# Altium PCB PCB1.PcbDoc
Units mil, origin at the board's own origin, x right, y up, seen from the top; angles counter-clockwise.
Board outline 1460 x 1490 mil, 2 copper layers (Top Layer, Bottom Layer); 54 components, 69 nets, 275 pads, 150 vias.
Unrouted connection lines stored in the file: 1.
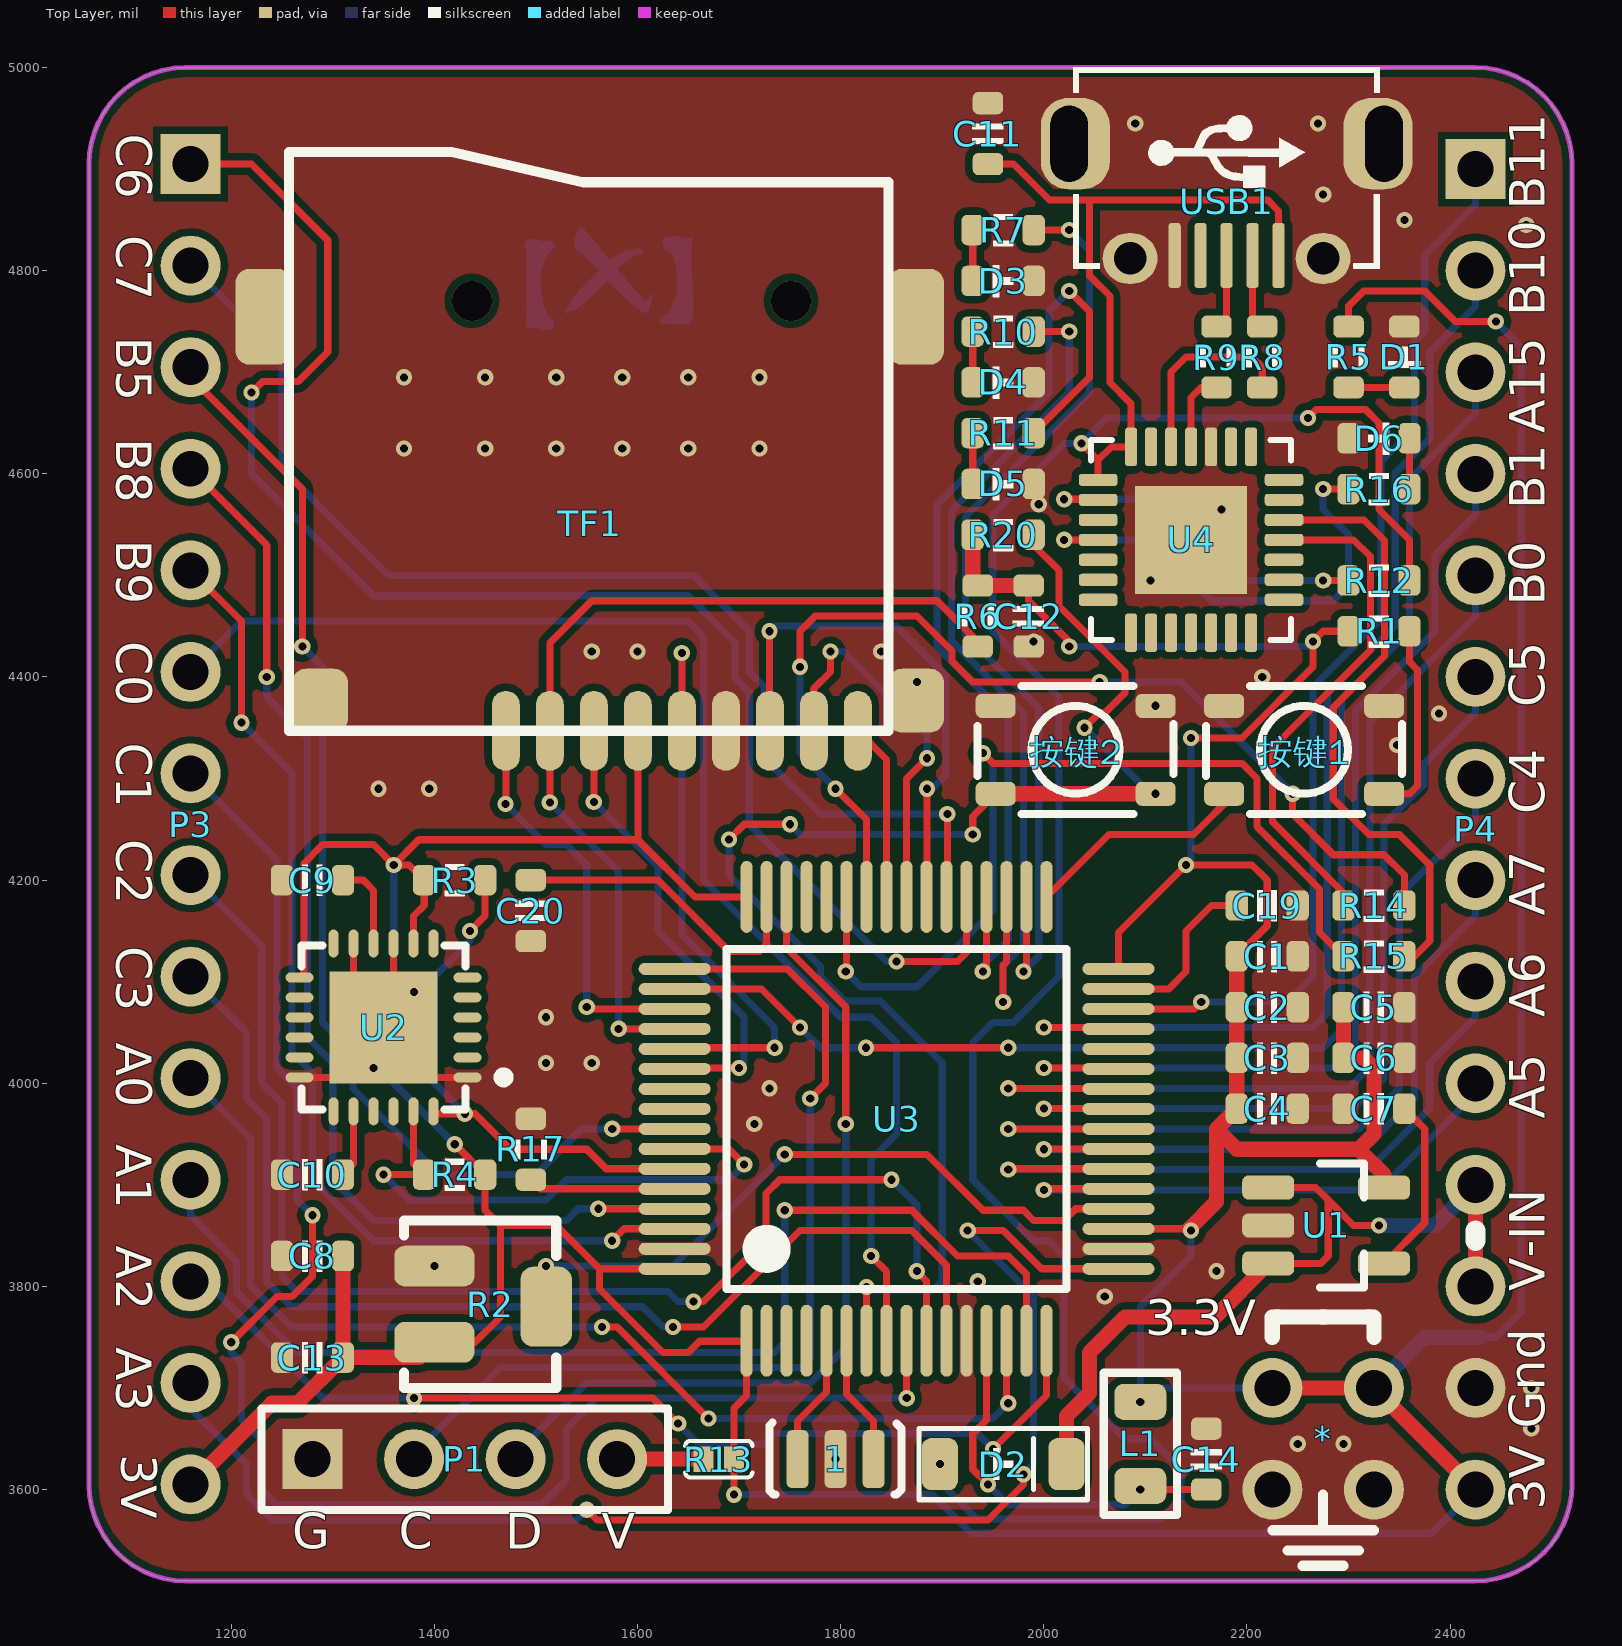
[diagram p0: Top Layer view]
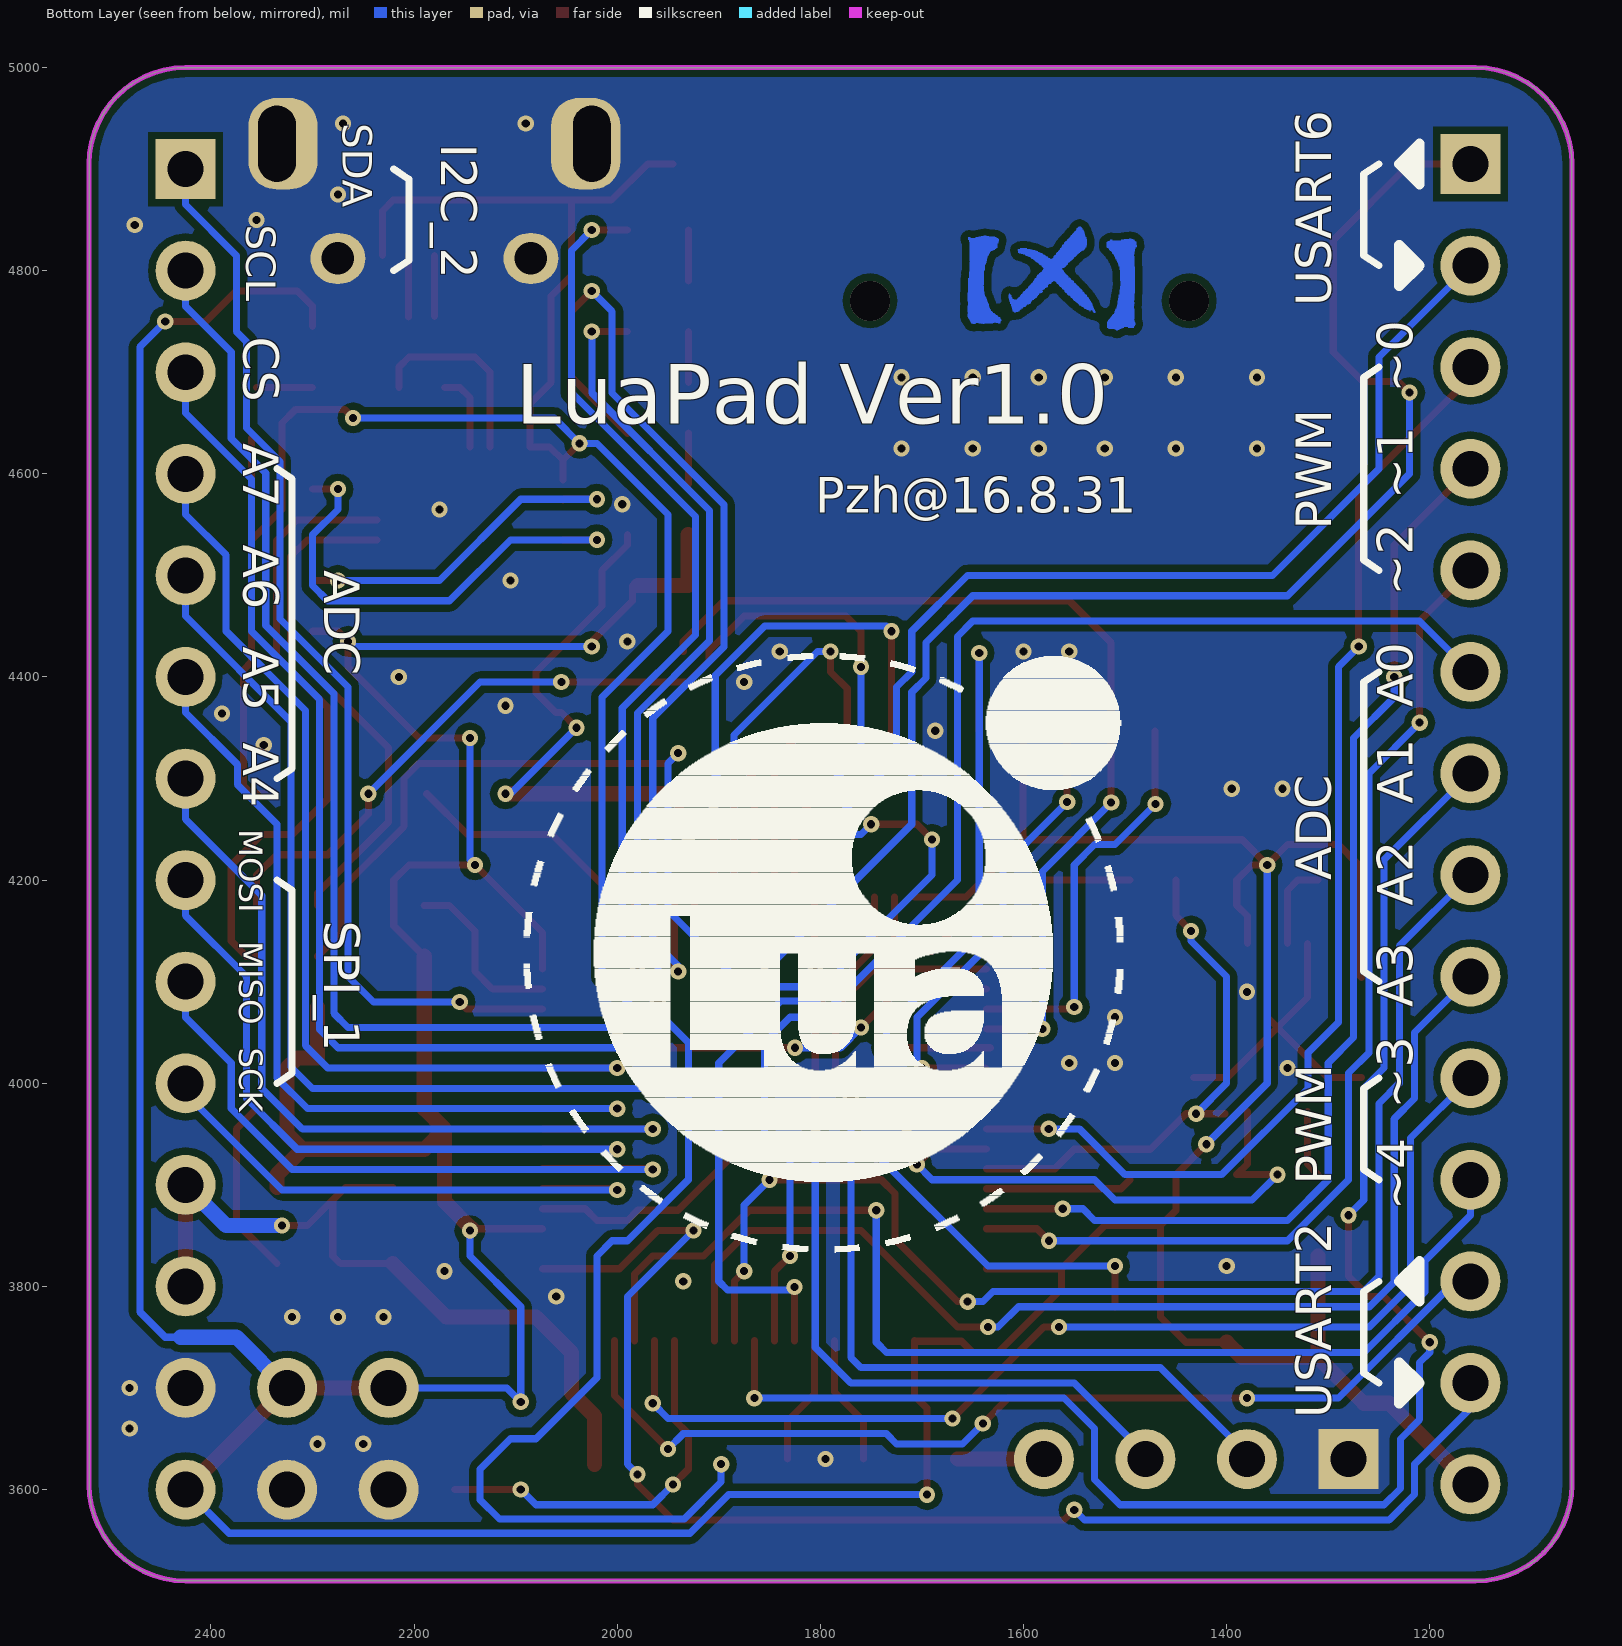
[diagram p1: Bottom Layer view, seen from below]
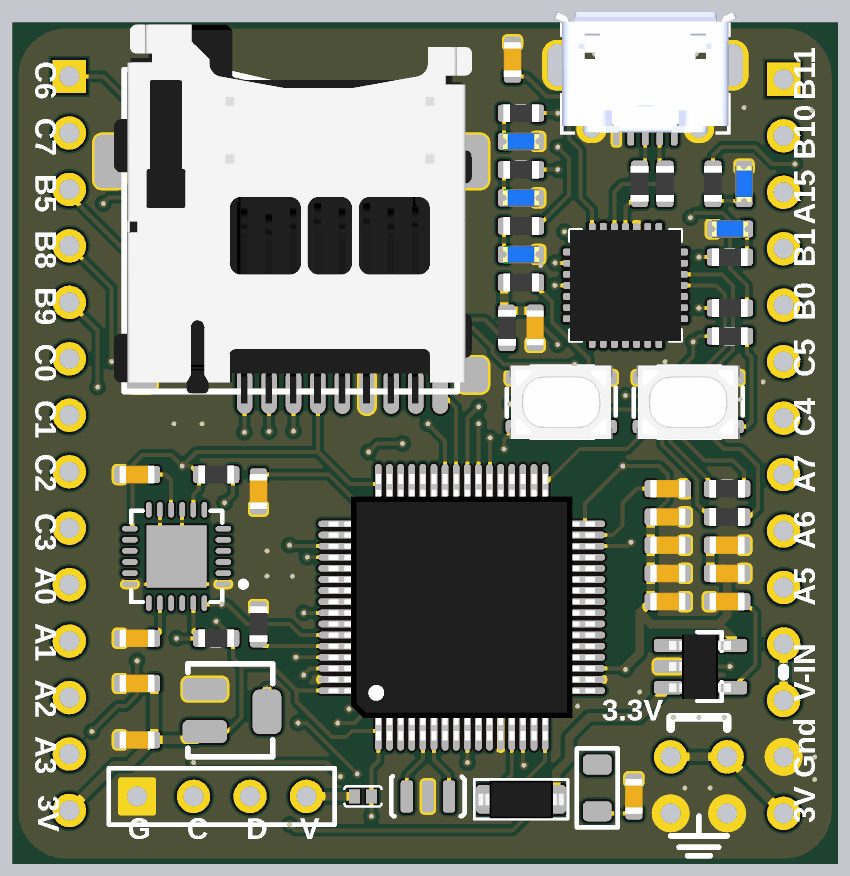
[diagram p2: 3D render of the assembled board from above, using the file's embedded part models]

## Layer stack, top to bottom
Top Solder: solder mask 0.4, Solder Resist, Dk 3.5
Top Layer: signal copper 1.4
Dielectric 1: dielectric 12.6, FR-4, Dk 4.8
Bottom Layer: signal copper 1.4
Bottom Solder: solder mask 0.4, Solder Resist, Dk 3.5

## Board outline
1155,3510 cw(c1155,3605) 1060,3605 1060,4905 cw(c1155,4905) 1155,5000 2425,5000 cw(c2425,4905) 2520,4905 2520,3605 cw(c2425,3605) 2425,3510

## Design rules (kind name [scope] priority, off if disabled: settings)
Clearance [All] p1: gap=7
MinimumSolderMaskSliver [All] p1: minsoldermaskwidth=1
PolygonConnect [All] p1: connectstyle=Direct reliefconductorwidth=10 reliefentries=4 polygonreliefangle="90 Angle" airgapwidth=10
RoutingVias [All] p1: holewidth=28 width=50 viastyle="Through Hole" minholewidth=28 minwidth=50 maxholewidth=28 maxwidth=50
SilkToSolderMaskClearance [IsPad] p1: minsilkscreentomaskgap=0 clearancetoexposedcopper=TRUE
SolderMaskExpansion [All] p1: expansion=4
UnpouredPolygon [All] p1: allowunpoured=FALSE
Width [All] p1: maxlimit=10000 minlimit=6 preferedwidth=7
27 further rules are at their usual default settings.

## Components (designator, comment, footprint, x,y, rotation, side; value= is the part's Value field where it differs from the comment)
1 "晶振-3Pin" 晶振-3P 1795,3630 r0 top
* "4PD" 4P 2225,3700 r0 top
C1 "10uF" 0603-CAP 2220,4125 r180 top
C2 "0.1uF" 0603-CAP 2220,4075 r0 top
C3 "0.1uF" 0603-CAP 2220,4025 r0 top
C4 "0.1uF" 0603-CAP 2220,3975 r0 top
C5 "电容-0603" 0603-CAP 2325,4075 r0 top
C6 "0.1uF" 0603-CAP 2325,4025 r0 top
C7 "10nF" 0603-CAP 2325,3975 r0 top
C8 "0.01uF" 0603-CAP 1280,3830 r0 top
C9 "0.1uF" 0603-CAP 1280,4200 r0 top
C10 "2.2nF" 0603-CAP 1280,3910 r180 top
C11 "1uF" 0603-CAP 1945,4935 r270 top
C12 "4.7uF" 0603-CAP 1985,4460 r270 top
C13 "0.1uF" 0603-CAP 1280,3730 r0 top
C14 "电容-0603" 0603-CAP 2160,3630 r270 top
C19 "2.2uF" 0603-CAP 2220,4175 r180 top
C20 "2.2uF" 0603-CAP 1495,4170 r90 top
D1 "LED-0603" 0603-LED-BLUE 2355,4715 r90 top
D2 "二极管-5819W" SOD-123 1960,3625 r0 top
D3 "LED-0603" 0603-LED-BLUE 1960,4790 r0 top
D4 "LED-0603" 0603-LED-BLUE 1960,4690 r0 top
D5 "LED-0603" 0603-LED-BLUE 1960,4590 r0 top
D6 "LED-0603" 0603-LED-BLUE 2330,4635 r180 top
L1 "10uH" 0805-L 2095,3645 r270 top
P1 "Header 4" HDR1X4 1280,3630 r0 top
P3 "14PL" 14P 1160,4905 r270 top
P4 "14PR" 14P 2425,4900 r270 top
R1 "4.7K" 0603-RES 2330,4445 r180 top
R2 "电位器-贴片" "贴片电位器 3*3" 1470,3775 r0 top
R3 "10K" 0603-RES 1420,4200 r180 top
R4 "10K" 0603-RES 1420,3910 r0 top
R5 "500R" 0603-RES 2300,4715 r270 top
R6 "100K" 0603-RES 1935,4460 r90 top
R7 "500R" 0603-RES 1960,4840 r180 top
R8 "22R" 0603-RES 2215,4715 r270 top
R9 "22R" 0603-RES 2170,4715 r270 top
R10 "500R" 0603-RES 1960,4740 r180 top
R11 "500R" 0603-RES 1960,4640 r180 top
R12 "10K" 0603-RES 2330,4495 r0 top
R13 "电阻-0R" 0402-0R 1680,3630 r0 top
R14 "1K" 0603-RES 2325,4175 r0 top
R15 "1K" 0603-RES 2325,4125 r180 top
R16 "500R" 0603-RES 2330,4585 r0 top
R17 "100K" 0603-RES 1495,3935 r90 top
R20 "4.7K" 0603-RES 1960,4540 r180 top
TF1 "TF" TF-SOCKET 1290,4675 r90 top
U1 "LP2992" SOT23-5 2280,3860 r0 top
U2 "MPU6050" QFN-24 1350,4055 r180 top
U3 "STM32F405RGT6" LQFP-64_N 1855,3965 r90 top
U4 "CP2102" QFN-28 2145,4535 r270 top
USB1 "USB-Micro" USB_Micro-AB 2180,4915 r0 top
按键1 "Reset" SW-KEY2 2335,4285 r180 top
按键2 "Reset" SW-KEY2 2110,4285 r180 top

## Footprints (in the part's own frame and the unit in brackets; to place one, negate y for a bottom-side part, rotate by r counter-clockwise, add the part's x,y. Pads: shape width x height; smd on the part's side, far side on the other; paste and mask are expansions set on the pad)
4P [mm] "Connector; Header; 4 Position"
  round 1.5 hole 0.9: 1(0,0) 2(2.54,0) 3(0,-2.54) 4(2.54,-2.54)
14P [mm] "Connector; Header; 4 Position"
  rect 1.5x1.5 hole 0.9: 1(0,0)
  round 1.5 hole 0.9: 2(2.54,0) 3(5.08,0) 4(7.62,0) 5(10.16,0) 6(12.7,0) 7(15.24,0) 8(17.78,0) 9(20.32,0) 10(22.86,0) 11(25.4,0) 12(27.94,0) 13(30.48,0) 14(33.02,0)
0402-0R [mil] "选择焊盘"
  rect 19.68x25 smd: 1(-15,0) 2(15,0)
  silkscreen extent -33,-18 33,18
0603-CAP [mil]
  rrect50% 22x30 smd: 1(-30,0) 2(30,0)
  silkscreen extent -10,-15 10,15, body extent -31,-16 32,16, height 31
0603-LED-BLUE [mil]
  rrect50% 22x30 smd: 1(-30,0) 2(30,0)
  silkscreen extent -10,-16 10,16, body extent -32,-16 32,16, height 24
0603-RES [mil]
  rrect50% 22x30 smd: 1(-30,0) 2(30,0)
  silkscreen extent -10,-16 10,16, body extent -31,-16 31,16, height 18
0805-L [mm]
  rrect50% 0.9x1.3 smd: 1(-1.05,0) 2(1.05,0)
  silkscreen extent -1.78,-0.91 1.78,0.91, body extent -1,-0.6 1,0.6, height 0.76
HDR1X4 [mm] "Connector; Header; 4 Position"
  rect 1.5x1.5 hole 0.9: 1(0,0)
  round 1.5 hole 0.9: 2(2.54,0) 3(5.08,0) 4(7.62,0)
  silkscreen extent -1.27,-1.27 8.89,1.27
LQFP-64_N [mm] "Thin QFP, 64-Leads, Body 10x10mm, Pitch 0.5mm, IPC Medium Density"
  oval 1.8x0.3 smd: 1(-5.55,3.75) 2(-5.55,3.25) 3(-5.55,2.75) 4(-5.55,2.25) 5(-5.55,1.75) 6(-5.55,1.25) 7(-5.55,0.75) 8(-5.55,0.25) 9(-5.55,-0.25) 10(-5.55,-0.75) 11(-5.55,-1.25) 12(-5.55,-1.75) 13(-5.55,-2.25) 14(-5.55,-2.75) 15(-5.55,-3.25) 16(-5.55,-3.75) 33(5.55,-3.75) 34(5.55,-3.25) 35(5.55,-2.75) 36(5.55,-2.25) 37(5.55,-1.75) 38(5.55,-1.25) 39(5.55,-0.75) 40(5.55,-0.25) 41(5.55,0.25) 42(5.55,0.75) 43(5.55,1.25) 44(5.55,1.75) 45(5.55,2.25) 46(5.55,2.75) 47(5.55,3.25) 48(5.55,3.75)
  oval 0.3x1.8 smd: 17(-3.75,-5.55) 18(-3.25,-5.55) 19(-2.75,-5.55) 20(-2.25,-5.55) 21(-1.75,-5.55) 22(-1.25,-5.55) 23(-0.75,-5.55) 24(-0.25,-5.55) 25(0.25,-5.55) 26(0.75,-5.55) 27(1.25,-5.55) 28(1.75,-5.55) 29(2.25,-5.55) 30(2.75,-5.55) 31(3.25,-5.55) 32(3.75,-5.55) 49(3.75,5.55) 50(3.25,5.55) 51(2.75,5.55) 52(2.25,5.55) 53(1.75,5.55) 54(1.25,5.55) 55(0.75,5.55) 56(0.25,5.55) 57(-0.25,5.55) 58(-0.75,5.55) 59(-1.25,5.55) 60(-1.75,5.55) 61(-2.25,5.55) 62(-2.75,5.55) 63(-3.25,5.55) 64(-3.75,5.55)
  silkscreen extent -4.25,-4.25 4.25,4.25, body extent -5.99,-5.99 5.98,5.98, height 1.6
QFN-24 [mm] "QFN, 24-Leads, Body 4.1x4.1mm (max), Pitch 0.50mm, IPC Low Density"
  oval 0.7x0.25 smd: 1(-2.1,1.25) 2(-2.1,0.75) 3(-2.1,0.25) 4(-2.1,-0.25) 5(-2.1,-0.75) 6(-2.1,-1.25) 13(2.1,-1.25) 14(2.1,-0.75) 15(2.1,-0.25) 16(2.1,0.25) 17(2.1,0.75) 18(2.1,1.25)
  oval 0.25x0.7 smd: 7(-1.25,-2.1) 8(-0.75,-2.1) 9(-0.25,-2.1) 10(0.25,-2.1) 11(0.75,-2.1) 12(1.25,-2.1) 19(1.25,2.1) 20(0.75,2.1) 21(0.25,2.1) 22(-0.25,2.1) 23(-0.75,2.1) 24(-1.25,2.1)
  rect 2.7x2.8 smd: ""(0,0)
  silkscreen extent -3.13,-2.05 2.05,2.05, body extent -2.05,-2.05 2.05,2.05, height 0.95
QFN-28 [mil]
  rrect50% 38x12 smd mask+5: 1(-91.5,59.06) 2(-91.5,39.37) 3(-91.5,19.68) 4(-91.5,0) 5(-91.5,-19.68) 6(-91.5,-39.37) 7(-91.5,-59.06) 15(91.5,-59.06) 16(91.5,-39.37) 17(91.5,-19.68) 18(91.5,0) 19(91.5,19.68) 20(91.5,39.37) 21(91.5,59.06)
  rrect50% 12x38 smd mask+5: 8(-59.06,-91.5) 9(-39.37,-91.5) 10(-19.69,-91.5) 11(0,-91.5) 12(19.69,-91.5) 13(39.37,-91.5) 14(59.06,-91.5) 22(59.06,91.5) 23(39.37,91.5) 24(19.69,91.5) 25(0,91.5) 26(-19.69,91.5) 27(-39.37,91.5) 28(-59.06,91.5)
  rect 106.3x110.24 smd: 29(0,0)
  silkscreen extent -99,-99 99,99, body extent -99,-99 98,98, height 35
SOD-123 [mm]
  rrect50% 0.9x1.3 smd: 1(-1.583,0) 2(1.583,0)
  silkscreen extent -2.11,-0.89 2.11,0.89, body extent -1.92,-0.86 1.93,0.84, height 1.48
SOT23-5 [mm] "SOT23, 3-Leads, Body 3.1x3.0mm (max), Pitch 0.95mm, IPC Medium Density"
  rrect50% 1.3x0.6 smd: 1(-1.5,0.95) 2(-1.5,0) 3(-1.5,-0.95) 4(1.396,-0.95) 5(1.396,0.95)
  silkscreen extent -0.2,-1.55 0.9,1.55, body extent -1.48,-1.45 1.32,1.45, height 1.2
SW-KEY2 [mm]
  rrect50% 1x0.6 smd: 1(0,0) 1(4,0) 2(0,-2.2) 2(4,-2.2)
  silkscreen extent -0.45,-2.7 4.45,0.5, body extent -0.31,-2.74 4.33,0.56, height 2
TF-SOCKET [mm]
  oval 2x0.7 smd: 1(-8.331,-4.582) 2(-8.331,-5.682) 3(-8.331,-6.782) 4(-8.331,-7.882) 5(-8.331,-8.982) 6(-8.331,-10.082) 7(-8.331,-11.182) 8(-8.331,-12.282) 9(-8.331,-13.382)
  rrect50% 1.6x1.4 smd: 10(-7.577,0.068) 10(-7.577,-14.836)
  rrect50% 2.4x1.4 smd: 10(2.023,1.476) 10(2.023,-14.836)
  silkscreen extent -8.33,-14.15 6.15,0.84, body extent -8.87,-14.81 8.18,1.29, height 2.05
USB_Micro-AB [mil]
  rrect80% 68x90 hole 37 slot 75 at 90 deg copper offset 6,0 mask+0: 0(-155,10)
  oval 54x50 hole 32 mask+0: 0(-95,-103) 0(95,-103)
  rrect80% 68x90 hole 37 slot 75 at 90 deg copper offset -6,0 mask+0: 0(155,10)
  rrect50% 12x64 smd: 1(51.18,-100) 2(25.59,-100) 3(0,-100) 4(-25.59,-100) 5(-51.18,-100)
  silkscreen extent -150,-113 150,86, body extent -161,-109 161,104, height 108
晶振-3P [mm] "贴片晶振"
  rrect50% 0.55x1.45 smd: 1(-0.95,0) 2(0,0) 3(0.95,0)
  silkscreen extent -1.65,-0.89 1.65,0.91, body extent -1.75,-0.75 1.75,0.75, height 0.3
"贴片电位器 3*3" [mil]
  rrect50% 78.74x40.18 smd: 1(-70,45) 2(-70,-30)
  rrect50% 50.74x78.74 smd: 3(40,5)
  silkscreen extent -100,-75 50,90

## Part data
1: "村田贴片"
C1 C2 C3 C4 C6 C7 C8 C9 C10 C11 C12 C13 C19 C20: library part 电容-0603, "Capacitor"
C5 C14: "Capacitor"
D1 D3 D4 D5 D6: "LED"
D2: "40V"
L1: library part 电感-0805, "磁珠"
P1: "Header, 4-Pin"
R1 R3 R4 R5 R6 R7 R8 R9 R10 R11 R12 R14 R15 R16 R17 R20: library part 电阻-0603, "Resistor"
R13: "Resistor"
TF1: library part TF卡座, "8脚自弹"
U1: "LDO"
U2: "六轴传感器"
U3: "MCU+FPU"
U4: "USBתTTL"
USB1: "USB"
按键1 按键2: library part 按键-4Pin, "贴片轻触"

## Via types
v1: diameter 16, hole 8, Top Layer to Bottom Layer, tented both sides, 148 vias
v2: diameter 39.37, hole 39.37, Top Layer to Bottom Layer, tented both sides, 2 vias

## Nets (pads, with @x,y where several pads share a name; then routed paths per layer and width w, separated by ;. In a path a pad name is that pad's centre, name@x,y a point inside that pad or via, vN(x,y) a via of type N, cw(c..) or ccw(c..) an arc to the next point about the centre after c; other vN are vias at no path point)
3V3: *.1 *.2 C1.2 C2.1 C3.1 C4.1 C5.1 C6.1 C8.2 C12.1 C13.2 L1.1 P3.14 P4.14 R1.2 R2.2 R3.2 R4.2 R5.1 R6.2 R13.2 R20.2 TF1.4 U1.5 U2.8 U2.13 U3.1 U3.19 U3.32 U3.48 U3.64 | length 6773.7
  Top Layer w7: U2.13 1271.5,4108.39 1271.5,4216.5 1290,4235 1340,4235 v1(1360,4215) ; U2.8 1379.53,4164.53 1390,4175 R3.2 1375,4215 v1(1360,4215) ; R2.2 1440,3745 1465,3770 1465,3860 ; v1(1420,3940) R4.2 1450,3875 1465,3860 ; TF1.4 1600.31,4239.69 ; U3.64 1562.64,3817.36 ; v1(1695,3595) R13.2 1695,3680 1707.36,3692.36 U3.1@1707.36,3746 ; U3.1 U3.1@1707.36,3746 ; U3.48 1656.5,4183.5 1600.31,4239.69 ; C12.1 1985,4475 2025,4435 v1(2025,4430) ; U3.19 v1@2143.27,3856.73 ; U3.32 2073.5,4148.5 v1(2140,4215) 2205,4215 2220,4200 2220,4155 C1.2 ; v1(2145,4340) 2195,4340 2265,4410 v1(2265,4435) 2275,4445 R1.2 ; R5.1 2300,4765 2315,4780 2375,4780 2405,4750 v1(2445,4750) ; v1(1360,4215) 1384.69,4239.69 1600.31,4239.69 ; 1465,3860 1520,3860 1562.64,3817.36 ; 1562.64,3817.36 1562.64,3797.36 1625,3735 1650,3735 1661,3746 U3.1@1707.36,3746
  Top Layer w15: P3.14 1240,3685 1265,3685 C13.2 ; C8.2 C13.2 ; R2.2 1385,3730 C13.2 ; R20.2 1930,4490 R6.2 C12.1@1980,4490 ; v1@2143.27,3856.73 2170,3883.46 2170,3955 ; C1.2 C2.1 C3.1 C4.1 2170,3955 ; *.1 *.2 P4.14 ; C5.1 C6.1 2315,4025 2325,4015 2325,3950 2310,3935 ; U1.5 2334.94,3910.06 2310,3935 ; 2170,3955 2190,3935 2310,3935
  Bottom Layer w7: v1(1360,4215) 1360,4000 v1(1420,3940) ; v1(1695,3595) 1890.2,3595 1928.2,3557 2382,3557 P4.14 ; v1(2025,4430) 2260,4430 v1(2265,4435) ; v1(2140,4215) 2145,4220 v1(2145,4340) ; v1(2145,3855) 2145,3830 2095,3780 v1(2095,3686.34) 2108.66,3700 *.1 ; 2430,3750 2445,3750 2470,3775 2470,4725 v1(2445,4750)
  Bottom Layer w15: *.2 2375,3750 2430,3750
CP_RX: R14.2 U3.42 | length 1043
  Top Layer w7: v1(1760,4410) 1760,4445 1775,4460 1875,4460 1909.5,4425.5 1909.5,4415.5 1930,4395 v1(2055,4395) ; v1(1795,4290) 1825.47,4259.53 U3.42 ; v1(2245,4285) 2245,4265 2285,4225 2335,4225 2355,4205 R14.2
  Bottom Layer w7: v1(1760,4410) 1760,4325 v1(1795,4290) ; v1(2055,4395) 2135,4395 v1(2245,4285)
CP_TX: R15.2 U3.43 | length 905.8
  Top Layer w7: v1(1805,4110) 1805.79,4110.79 U3.43 ; v1(1940,4325) 1950,4315 2195,4315 2210,4300 2210,4252.63 2271.5,4191.13 2271.5,4148.5 R15.2
  Bottom Layer w7: v1(1805,4110) 1820,4095 1875,4095 1950,4170 1950,4315 v1(1940,4325)
GND: 1.2 *.3 *.4 C1.1 C2.2 C3.2 C4.2 C5.2 C6.2 C7.1 C8.1 C9.1 C10.2 C11.1 C12.2 C13.1 C14.1 C19.1 C20.1 D1.2 D3.2 D4.2 D5.2 D6.2 P1.1 P4.13 R2.1 R17.2 TF1.6 TF1.10 U1.2 U2. U2.1 U2.9 U2.11 U2.18 U3.12 U3.18 U3.63 U4.3 U4.29 USB1.0 USB1.5 按键1.2 按键2.2 | length 387.8
  Top Layer w7: U2.18 1300.79,4005.79 U2. ; U2.11 1320.47,4084.53 U2. ; U2.9 1359.84,4064.84 U2. ; U2.1 1399.21,4005.79 U2.
  other v1: 1795,3630 2250,3645 2295,3645 2480,3660 2480,3700 2230,3770 2275,3770 2320,3770 2060,3790 2170,3815 1400,3820 1715,3960 1730,3995 1340,4015 1510,4020 1555,4020 1510,4065 1380,4090 1345,4290 1395,4290 2348,4333 1686.92,4347 2389,4364 2110,4371.61 1875,4395 2215,4400 1555,4425 1600,4425 1840,4425 1990,4435 2105,4495 2175,4565 1995,4570 1370,4625 1450,4625 1520,4625 1585,4625 1650,4625 1720,4625 1370,4695 1450,4695 1520,4695 1585,4695 1650,4695 1720,4695 2475,4845 2355,4850 2275,4875 2090,4945 2270,4945
I2C1_SCL: R4.1 U2.23 U3.58 | length 561.4
  Top Layer w7: v1(1350,3910) R4.1 1379.53,3920.47 U2.23 ; U3.58 1689.53,3935.47 v1(1705,3920)
  Bottom Layer w7: v1(1350,3910) 1375,3885 1510,3885 1530,3905 1690,3905 v1(1705,3920)
I2C1_SDA: R3.1 U2.24 U3.59 | length 520.6
  Top Layer w7: U2.24@1401.54,3970 v1(1430,3970) 1440,3970 1475,3935 1550,3935 1569.21,3915.79 U3.59 ; v1(1435,4150) 1450,4165 R3.1
  Bottom Layer w7: v1(1430,3970) 1400,4000 1400,4105 1435,4140 v1(1435,4150)
LED1: R7.1 U3.34 | length 938.7
  Top Layer w7: v1@1980,4105.91 v1(1980,4110) 1982.95,4112.95 U3.34 ; R7.1 v1(2025,4840)
  Bottom Layer w7: v1(1980,4110) 1995,4125 1995,4369.4 1923,4441.4 1923,4558 2045,4680 2045,4820 v1(2025,4840)
LED2: R10.1 U3.35 | length 885.6
  Top Layer w7: v1(1960,4080) 1960,4116.16 1963.27,4119.43 U3.35 ; R10.1 v1(2025,4740)
  Bottom Layer w7: v1(1960,4080) 1960,4116.16 1980,4136.16 1980,4364.6 1909,4435.6 1909,4563.8 2025,4679.8 v1(2025,4740)
LED3: R11.1 U3.36 | length 1009.3
  Top Layer w7: v1(1940,4110) 1943.58,4113.58 U3.36 ; R11.1 2045,4695 2045,4760 v1(2025,4780)
  Bottom Layer w7: v1(1940,4110) 1940,4115.96 1965,4140.96 1965,4359.8 1895,4429.8 1895,4569.6 2005,4679.6 2005,4760 v1(2025,4780)
Net1_1: 1.1 U3.5 | length 128.3
  Top Layer w7: 1.1 1757.6,3667.6 1786.1,3696.1 U3.5
Net1_3: 1.3 U3.6 | length 127.5
  Top Layer w7: U3.6 1805.79,3694.21 1832.4,3667.6 1.3
NetC7_2: C7.2 U1.4 | length 177.3
  Top Layer w7: U1.4 2375,3862.65 2375,3955 C7.2
NetC9_2: C9.2 U2.10 | length 86.5
  Top Layer w7: C9.2 1330,4200 1340.16,4189.84 U2.10
NetC10_1: C10.1 U2.20 | length 66.7
  Top Layer w7: C10.1 1320.47,3920.47 U2.20
NetC14_2: C14.2 L1.2 U3.13 | length 379.2
  Top Layer w7: U3.13 1943.58,3668.58 1930,3655 1930,3620 v1(1945,3605) ; L1.2@2098.66,3600 C14.2
  Bottom Layer w7: v1(1945,3605) 1965,3585 2080,3585 v1(2095,3600)
NetC19_2: C19.2 U3.31 | length 173.9
  Top Layer w7: U3.31 2122.95,4092.95 2140,4110 2140,4150 2165,4175 C19.2
NetC20_2: C20.2 U3.47 | length 310.4
  Top Layer w7: C20.2 1620.2,4200 1690.2,4130 1720,4130 1727.05,4137.05 U3.47
NetD1_1: D1.1 R5.2 | length 55
  Top Layer w7: R5.2 D1.1
NetD3_1: D3.1 R7.2 | length 50
  Top Layer w7: D3.1 R7.2
NetD4_1: D4.1 R10.2 | length 50
  Top Layer w7: D4.1 R10.2
NetD5_1: D5.1 R11.2 | length 50
  Top Layer w7: D5.1 R11.2
NetD6_1: D6.1 R16.2 | length 50
  Top Layer w7: R16.2 D6.1
NetP1_4: P1.4 R13.1 | length 85
  Top Layer w15: P1.4 R13.1
NetR8_1: R8.1 USB1.2 | length 60.6
  Top Layer w7: R8.1@2205.59,4754.41 USB1.2
NetR9_1: R9.1 USB1.3 | length 60
  Top Layer w7: R9.1@2180,4755 USB1.3
NetR12_1: R12.1 U4.9 | length 346.9
  Top Layer w7: v1(2020,4575) 2052.87,4575 U4.9 ; v1(2275,4495) R12.1
  Bottom Layer w7: v1(2020,4575) 2095,4575 2175,4495 v1(2275,4495)
NetR14_1: R14.1 U4.25 | length 504.3
  Top Layer w7: U4.25 2305,4535 2321.5,4518.5 2321.5,4426.5 2225,4330 2225,4257.43 2295,4187.43 R14.1
NetR15_1: R15.1 U4.26 | length 610.9
  Top Layer w7: U4.26 2315.32,4554.69 2335.5,4534.5 2335.5,4420.5 2285,4370 2285,4280 2320,4245 2350,4245 2380,4215 2380,4140 2365,4125 R15.1
NetR16_1: R16.1 U4.11 | length 474.9
  Top Layer w7: v1(2020,4535) U4.11 ; v1(2275,4585) R16.1
  Bottom Layer w7: v1(2020,4535) 2105,4535 2165,4475 2285,4475 2300,4490 2300,4540 2275,4565 v1(2275,4585)
NetR17_1: R17.1 U3.60 | length 145.2
  Top Layer w7: R17.1 1503.9,3896.1 U3.60
NetR20_1: R20.1 U3.7 按键2.1 | length 1476
  Top Layer w7: v1(1690,4240) 1705,4255 v1(1750,4255) ; U3.7 v1(1825.47,3799.53) ; v1(1930,4245) 1930,4262.48 按键2.1@1952.52,4285 ; R20.1 1990,4530 2015,4505 2015,4470 2080,4405 2080,4384.5 2060.5,4365 2055,4365 v1(2040,4350)
  Top Layer w15: 按键2.1@1952.52,4285 v1(2110,4285)
  Bottom Layer w7: v1(1690,4240) 1690,4205 1780,4115 1780,4105 1804,4081 1839,4081 1900,4020 1900,3805 1891.5,3796.5 1828.5,3796.5 v1(1825.47,3799.53) ; v1(1750,4255) 1760,4245 v1(1930,4245) ; v1(2040,4350) 2105,4285 v1(2110,4285)
PA0: P3.10 U3.14 | length 1094.9
  Top Layer w7: v1(1565,3760) 1580,3760 v1(1670,3670) ; v1@1963.27,3686.73 U3.14
  Bottom Layer w7: P3.10 1219,3946 1219,3800.6 1259.6,3760 v1(1565,3760) ; v1(1670,3670) 1950,3670 v1(1965,3685)
PA1: P3.11 U3.15 | length 1157.3
  Top Layer w7: v1(1745,3875) 1870,3875 1915,3830 1965,3830 1982.95,3812.05 U3.15
  Bottom Layer w7: P3.11 1160,3870 1205,3825 1205,3794.8 1264.8,3735 1735,3735 1745,3745 v1(1745,3875)
PA2: P3.12 U3.16 | length 994.9
  Top Layer w7: v1(1380,3690) 1615,3690 v1(1640,3665) ; v1(1950,3640) 2002.64,3692.64 U3.16
  Bottom Layer w7: P3.12 1175,3805 1290,3690 v1(1380,3690) ; v1(1640,3665) 1660,3645 1725,3645 1735,3655 1935,3655 v1(1950,3640)
PA3: P3.13 U3.17 | length 1376.1
  Top Layer w7: v1(1550,3580) 1560,3570 1945,3570 1980,3605 v1(1980,3615) ; v1(1925,3855) 1960,3855 1997.64,3817.36 U3.17
  Bottom Layer w7: P3.13 1160,3680 1215,3625 1215,3595 1240,3570 1540,3570 v1(1550,3580) ; v1(1925,3855) 1990,3790 1990,3625 v1(1980,3615)
PA5: P4.10 U3.21 | length 546.8
  Top Layer w7: v1@2001.1,3896.1 U3.21
  Bottom Layer w7: v1(2000,3895) 2330,3895 2425,3990 P4.10
PA6: P4.9 U3.22 | length 691.2
  Top Layer w7: v1@1965.79,3915.79 U3.22
  Bottom Layer w7: v1(1965,3915) 2320,3915 2380,3975 2380,4020 2425,4065 P4.9
PA7: P4.8 U3.23 | length 698.6
  Top Layer w7: v1@2000.47,3935.47 U3.23
  Bottom Layer w7: v1(2000,3935) 2315,3935 2365,3985 2365,4105 2425,4165 P4.8
PA15: P4.3 U3.50 | length 1389.6
  Top Layer w7: U3.50 1722.05,4092.95 v1(1760,4055) ; v1(1825,4035) v1(1965,4035)
  Bottom Layer w7: v1(1760,4055) 1780,4035 v1(1825,4035) ; v1(1965,4035) 2275,4035 2293,4053 2293,4378 2360,4445 2360,4595 2425,4660 P4.3
PB0: P4.5 U3.26 | length 999.8
  Top Layer w7: v1(1965,3995) U3.26@2073.03,3995
  Bottom Layer w7: v1(1965,3995) 2300,3995 2321,4016 2321,4356 2425,4460 P4.5
PB1: P4.4 U3.27 | length 1000.7
  Top Layer w7: v1(2000,4015) U3.27@2072.72,4015
  Bottom Layer w7: v1(2000,4015) 2285,4015 2307,4037 2307,4367 2384.97,4444.97 2384.97,4519.97 2425,4560 P4.4
PB5: P3.3 U3.57 | length 1146.7
  Top Layer w7: P3.3 1160,4695 1270,4585 v1(1270,4430) ; v1(1575.16,3955.16) U3.57
  Bottom Layer w7: v1(1270,4430) 1290,4410 1290,4060 1320,4030 1320,3995 1405,3910 1500,3910 1545.16,3955.16 v1(1575.16,3955.16)
PB8: P3.4 U3.61 | length 1115.8
  Top Layer w7: P3.4 1235,4530 v1(1235,4400) ; v1(1561.42,3876.42) U3.61
  Bottom Layer w7: v1(1235,4400) 1235,4380 1275,4340 1275,4045 1300,4020 1300,3905 1340,3865 1530,3865 1541.42,3876.42 v1(1561.42,3876.42)
PB9: P3.5 U3.62 | length 1035.9
  Top Layer w7: P3.5 1210,4455 v1(1210,4355) ; v1(1575,3845) 1586.73,3856.73 U3.62
  Bottom Layer w7: v1(1210,4355) 1260,4305 1260,4030 1280,4010 1280,3905 1340,3845 v1(1575,3845)
PB10: P4.2 U3.29 | length 1148.4
  Top Layer w7: v1(2000,4055) U3.29@2072.09,4055
  Bottom Layer w7: v1(2000,4055) 2265,4055 2279,4069 2279,4383.8 2346,4450.8 2346,4600.8 2380,4634.8 2380,4720 2425,4765 P4.2
PB11: P4.1 U3.30 | length 1065.9
  Top Layer w7: U3.30 2148.27,4073.27 v1(2155,4080)
  Bottom Layer w7: v1(2155,4080) 2240,4080 2265,4105 2265,4390 2332,4457 2332,4612 2365,4645 2365,4730 2375,4740 2375,4815 2425,4865 P4.1
PC0: P3.6 U3.8 | length 1338.3
  Top Layer w7: v1(1830,3830) 1845.16,3814.84 U3.8
  Bottom Layer w7: P3.6 1210,4455 1650,4455 1665,4440 1665,4200 1800,4065 1830,4065 1855,4040 1855,3950 1830,3925 v1(1830,3830)
PC1: P3.7 U3.9 | length 1579.6
  Top Layer w7: v1(1200,3745) 1245,3790 1260,3790 1280,3810 v1(1280,3870) ; U3.9 1864.84,3690.16 v1(1865,3690)
  Bottom Layer w7: P3.7 1245,4220 1245,4015 1265,3995 1265,3885 v1(1280,3870) ; v1(1200,3745) 1200,3735 1210,3725 1210,3668.8 1229,3649.8 1229,3601 1245,3585 1505,3585 1530,3610 1530,3660 1560,3690 v1(1865,3690)
PC2: P3.8 U3.10 | length 1291.5
  Top Layer w7: v1(1655,3785) 1665,3785 1726.5,3846.5 1726.5,3891.5 1740,3905 v1(1850,3905) ; v1(1875,3815) 1884.53,3805.47 U3.10
  Bottom Layer w7: P3.8 1230,4135 1230,4000 1250,3980 1250,3810 1265,3795 1630,3795 1640,3785 v1(1655,3785) ; v1(1850,3905) 1875,3880 v1(1875,3815)
PC3: P3.9 U3.11 | length 1147.1
  Top Layer w7: v1(1635,3760) 1665,3760 1760,3855 1870,3855 1904.21,3820.79 U3.11
  Bottom Layer w7: P3.9 1215,4050 1215,3985 1235,3965 1235,3804.4 1259.4,3780 1605,3780 1625,3760 v1(1635,3760)
PC4: P4.7 U3.24 | length 846
  Top Layer w7: v1(1965,3955) U3.24@2073.35,3955
  Bottom Layer w7: v1(1965,3955) 2310,3955 2350,3995 2350,4185 2425,4260 P4.7
PC5: P4.6 U3.25 | length 853.1
  Top Layer w7: v1(2000,3975) U3.25@2073.35,3975
  Bottom Layer w7: v1(2000,3975) 2305,3975 2335,4005 2335,4255 2374,4294 2374,4314 2425,4365 P4.6
PC6: P3.1 U3.37 | length 1505.3
  Top Layer w7: P3.1 1220,4905 1295,4830 1295,4720 1265.71,4690.71 1230.71,4690.71 v1(1220,4680) ; v1(1855,4120) 1915,4120 1923.9,4128.9 U3.37
  Bottom Layer w7: v1(1220,4680) 1220,4600.03 1340.03,4480 1650,4480 1696,4434 1696,4399 1710,4385 1710,4255 1845,4120 v1(1855,4120)
PC7: P3.2 U3.38 | length 1179.4
  Top Layer w7: U3.38 1905,4184.29 v1(1905,4265)
  Bottom Layer w7: P3.2 1250,4715 1250,4605 1355,4500 1655,4500 1710,4445 1710,4405 1725,4390 1725,4320 1780,4265 v1(1905,4265)
RES_ADC: R2.3 U3.20 | length 680.7
  Top Layer w7: R2.3 v1(1510,3820) ; v1(1745,3930) 1885,3930 1940,3875 1980,3875 1990,3865 2020,3865 2031.42,3876.42 U3.20
  Bottom Layer w7: v1(1510,3820) 1635,3820 v1(1745,3930)
SDIO_CLK: TF1.5 U3.53 | length 605.5
  Top Layer w7: U3.53@1632.6,4035 v1(1735,4035) ; TF1.5 v1(1643.61,4423.61)
  Bottom Layer w7: v1(1643.61,4423.61) 1643.61,4146.39 1735,4055 v1(1735,4035)
SDIO_CMD: TF1.3 U3.54 | length 458.1
  Top Layer w7: v1(1557,4277) TF1.3 ; U3.54@1637.28,4015 v1(1700,4015)
  Bottom Layer w7: v1(1557,4277) 1620,4214 1620,4150 1705,4065 1705,4020 v1(1700,4015)
SDIO_D0: TF1.7 U3.39 | length 528.9
  Top Layer w7: v1(1730,4445) 1730,4347.23 TF1.7 ; U3.39@1885,4183.98 v1(1885,4290)
  Bottom Layer w7: v1(1730,4445) 1735,4450 1855,4450 1903.5,4401.5 1903.5,4303.5 1885,4285 v1(1885,4290)
SDIO_D1: TF1.8 U3.40 | length 381.6
  Top Layer w7: TF1.8 1773.54,4388.53 1790,4405 v1(1790,4425) ; U3.40 1864.84,4299.84 v1(1885,4320)
  Bottom Layer w7: v1(1790,4425) 1802.93,4425 1885,4342.93 v1(1885,4320)
SDIO_D2: TF1.1 U3.51 | length 401.8
  Top Layer w7: v1(1470,4275) 1470,4280 1470.39,4280.39 TF1.1 ; v1@1551.73,4073.27 U3.51
  Bottom Layer w7: v1(1470,4275) 1510,4235 1530,4235 1550,4215 v1(1550,4075)
SDIO_D3: R6.1 TF1.2 U3.52 | length 928.2
  Top Layer w7: v1(1513.69,4276.31) TF1.2 1513.69,4433.69 1555,4475 1895,4475 1935,4435 R6.1@1935,4425 ; v1(1581.42,4053.58) U3.52
  Bottom Layer w7: v1(1513.69,4276.31) 1581.42,4208.58 v1(1581.42,4053.58)
SDIO_SW: TF1.9 U3.41 | length 175.2
  Top Layer w7: TF1.9 1845.16,4318.68 U3.41
SWCLK: P1.2 U3.49 | length 947.6
  Top Layer w7: U3.49 1747.36,4112.64 1785,4075 1785,4000 v1(1770,3985)
  Bottom Layer w7: P1.2@1385,3630 1385,3640 1465,3720 1760,3720 1770,3730 v1(1770,3985)
SWDIO: P1.3 U3.46 | length 839.1
  Top Layer w7: U3.46 1746.73,4133.27 1805,4075 v1(1805,3960)
  Bottom Layer w7: P1.3@1485,3630 1485,3640 1550,3705 1770,3705 1805,3740 v1(1805,3960)
USB_DM: R8.2 U4.5 | length 193.7
  Top Layer w7: U4.5 2125.32,4700.31 2140,4715 2205,4715 2215,4705 R8.2
USB_DP: R9.2 U4.4 | length 77.6
  Top Layer w7: U4.4 2145,4675 2155,4685 R9.2
USR_KEY: R1.1 U3.33 按键1.1 | length 408.6
  Top Layer w7: U3.33 2064.13,4245 2147.52,4245 按键1.1@2187.52,4285 ; 按键1.1@2345,4285 2360,4285 2368,4293 2368,4407 2360,4415 R1.1
VBUS: C11.2 D2.1 R12.2 U4.7 U4.8 USB1.1 | length 2715.7
  Top Layer w7: C11.2 1970,4905 2005.5,4869.5 2045,4869.5 ; v1(2037,4630) 2053.5,4613.5 ; U4.8 2053.5,4613.5 ; USB1.1 2231.18,4858.82 2220.5,4869.5 2045,4869.5 ; v1(2260,4655) 2268.5,4663.5 2316.5,4663.5 2330,4650 2330,4565 2360,4535 R12.2 ; 2045,4869.5 2045,4795 2065,4775 2065,4690 2085.94,4669.06 U4.7 2066.5,4626.5 2053.5,4613.5
  Bottom Layer w7: v1(1897.66,3625) 1897.66,3607.34 1934,3571 2116,3571 2135,3590 2135,3620 2105,3650 2080,3650 2020,3710 2020,3830 2005,3845 1990,3845 1930,3905 1930,4040 1950,4060 1970,4060 2015,4105 2015,4380 1950,4445 1950,4560 2020,4630 v1(2037,4630) 2062,4655 v1(2260,4655)
VIN: D2.2 P4.11 P4.12 U1.1 U1.3 | length 784.9
  Top Layer w7: U1.3 2272.6,3822.6 2280,3830 2280,3885 ; U1.1 2267.6,3897.4 2280,3885 ; v1(2330,3860) 2305,3860 2280,3885
  Top Layer w15: D2.2 2022.34,3672.34 2045,3695 2045,3735 2080,3770 2168.35,3770 U1.3 ; P4.12 P4.11
  Bottom Layer w15: v1(2330,3860) 2385,3860 P4.11
pads on no net: U2.2 U2.3 U2.4 U2.5 U2.6 U2.7 U2.12 U2.14 U2.15 U2.16 U2.17 U2.19 U2.21 U2.22 U3.2 U3.3 U3.4 U3.28 U3.44 U3.45 U3.55 U3.56 U4.1 U4.2 U4.6 U4.10 U4.12 U4.13 U4.14 U4.15 U4.16 U4.17 U4.18 U4.19 U4.20 U4.21 U4.22 U4.23 U4.24 U4.27 U4.28 USB1.4
copper on no net: | length 9363
  Bottom Layer w0.6: 1488.6,4823.8 1518,4823.8 ; 1488.6,4824.4 1518,4824.4 ; 1489.2,4823.2 1518,4823.2 ; 1489.2,4825 1518,4825 ; 1489.2,4825.6 1518,4825.6 ; 1489.2,4826.2 1518,4826.2 ; 1489.2,4826.8 1518,4826.8 ; 1489.2,4827.4 1518,4827.4 ; 1489.2,4828 1517.4,4828 ; 1489.8,4747 1517.4,4747 ; 1489.8,4747.6 1517.4,4747.6 ; 1489.8,4748.2 1517.4,4748.2 ; 1489.8,4821.4 1516.2,4821.4 ; 1489.8,4822 1516.2,4822 ; 1489.8,4822.6 1517.4,4822.6 ; 1489.8,4828.6 1516.8,4828.6 ; 1490.4,4745.8 1517.4,4745.8 ; 1490.4,4746.4 1517.4,4746.4 ; 1490.4,4748.8 1517.4,4748.8 ; 1490.4,4749.4 1517.4,4749.4 ; 1490.4,4777.6 1505.4,4777.6 ; 1490.4,4778.2 1505.4,4778.2 ; 1490.4,4778.8 1505.4,4778.8 ; 1490.4,4779.4 1505.4,4779.4 ; 1490.4,4780 1505.4,4780 ; 1490.4,4780.6 1505.4,4780.6 ; 1490.4,4781.2 1504.8,4781.2 ; 1490.4,4781.8 1504.8,4781.8 ; 1490.4,4782.4 1504.8,4782.4 ; 1490.4,4783 1504.8,4783 ; 1490.4,4783.6 1504.8,4783.6 ; 1490.4,4784.2 1504.8,4784.2 ; 1490.4,4784.8 1504.2,4784.8 ; 1490.4,4785.4 1504.2,4785.4 ; 1490.4,4786 1504.2,4786 ; 1490.4,4786.6 1504.2,4786.6 ; 1490.4,4787.2 1504.2,4787.2 ; 1490.4,4787.8 1504.2,4787.8 ; 1490.4,4788.4 1504.2,4788.4 ; 1490.4,4789 1504.2,4789 ; 1490.4,4789.6 1504.2,4789.6 ; 1490.4,4790.2 1504.8,4790.2 ; 1490.4,4790.8 1504.8,4790.8 ; 1490.4,4791.4 1504.8,4791.4 ; 1490.4,4792 1504.8,4792 ; 1490.4,4792.6 1504.8,4792.6 ; 1490.4,4793.2 1504.8,4793.2 ; 1490.4,4793.8 1504.8,4793.8 ; 1490.4,4794.4 1504.8,4794.4 ; 1490.4,4795 1504.8,4795 ; 1490.4,4795.6 1504.8,4795.6 ; 1490.4,4796.2 1504.8,4796.2 ; 1490.4,4796.8 1504.8,4796.8 ; 1490.4,4797.4 1504.8,4797.4 ; 1490.4,4798 1504.8,4798 ; 1490.4,4798.6 1504.8,4798.6 ; 1490.4,4799.2 1504.8,4799.2 ; 1490.4,4799.8 1504.8,4799.8 ; 1490.4,4800.4 1504.8,4800.4 ; 1490.4,4801 1505.4,4801 ; 1490.4,4801.6 1505.4,4801.6 ; 1490.4,4802.2 1505.4,4802.2 ; 1490.4,4802.8 1505.4,4802.8 ; 1490.4,4803.4 1505.4,4803.4 ; 1490.4,4819 1513.8,4819 ; 1490.4,4819.6 1514.4,4819.6 ; 1490.4,4820.2 1515,4820.2 ; 1490.4,4820.8 1515.6,4820.8 ; 1490.4,4829.2 1515,4829.2 ; 1491,4745.2 1517.4,4745.2 ; 1491,4750 1516.8,4750 ; 1491,4750.6 1516.8,4750.6 ; 1491,4752.4 1515,4752.4 ; 1491,4753 1514.4,4753 ; 1491,4753.6 1513.8,4753.6 ; 1491,4754.2 1513.8,4754.2 ; 1491,4754.8 1513.2,4754.8 ; 1491,4755.4 1512.6,4755.4 ; 1491,4756 1512,4756 ; 1491,4756.6 1511.4,4756.6 ; 1491,4757.2 1510.8,4757.2 ; 1491,4757.8 1510.8,4757.8 ; 1491,4758.4 1510.2,4758.4 ; 1491,4759 1510.2,4759 ; 1491,4759.6 1510.2,4759.6 ; 1491,4760.2 1509.6,4760.2 ; 1491,4760.8 1509.6,4760.8 ; 1491,4761.4 1509,4761.4 ; 1491,4762 1509,4762 ; 1491,4766.2 1507.8,4766.2 ; 1491,4767.4 1507.2,4767.4 ; 1491,4768 1507.2,4768 ; 1491,4768.6 1507.2,4768.6 ; 1491,4771 1506.6,4771 ; 1491,4771.6 1506.6,4771.6 ; 1491,4772.2 1506.6,4772.2 ; 1491,4772.8 1506,4772.8 ; 1491,4773.4 1506,4773.4 ; 1491,4774 1506,4774 ; 1491,4774.6 1506,4774.6 ; 1491,4775.2 1506,4775.2 ; 1491,4775.8 1506,4775.8 ; 1491,4776.4 1505.4,4776.4 ; 1491,4777 1505.4,4777 ; 1491,4804 1505.4,4804 ; 1491,4804.6 1506,4804.6 ; 1491,4805.2 1506,4805.2 ; 1491,4805.8 1506,4805.8 ; 1491,4806.4 1506.6,4806.4 ; 1491,4807 1506.6,4807 ; 1491,4807.6 1507.2,4807.6 ; 1491,4808.2 1507.2,4808.2 ; 1491,4808.8 1507.8,4808.8 ; 1491,4809.4 1507.8,4809.4 ; 1491,4810 1508.4,4810 ; 1491,4810.6 1508.4,4810.6 ; 1491,4811.2 1509,4811.2 ; 1491,4811.8 1509,4811.8 ; 1491,4812.4 1509.6,4812.4 ; 1491,4813 1509.6,4813 ; 1491,4813.6 1510.2,4813.6 ; 1491,4816 1511.4,4816 ; 1491,4816.6 1512,4816.6 ; 1491,4817.2 1512.6,4817.2 ; 1491,4817.8 1512.6,4817.8 ; 1491,4818.4 1513.2,4818.4 ; 1491,4829.8 1503.6,4829.8 ; 1491.6,4744 1497,4744 ; 1491.6,4744.6 1517.4,4744.6 ; 1491.6,4751.2 1516.2,4751.2 ; 1491.6,4751.8 1515.6,4751.8 ; 1491.6,4762.6 1508.4,4762.6 ; 1491.6,4763.2 1508.4,4763.2 ; 1491.6,4763.8 1508.4,4763.8 ; 1491.6,4764.4 1507.8,4764.4 ; 1491.6,4765 1507.8,4765 ; 1491.6,4765.6 1507.8,4765.6 ; 1491.6,4766.8 1507.2,4766.8 ; 1491.6,4769.2 1507.2,4769.2 ; 1491.6,4769.8 1507.2,4769.8 ; 1491.6,4770.4 1506.6,4770.4 ; 1491.6,4814.2 1510.2,4814.2 ; 1491.6,4814.8 1510.8,4814.8 ; 1491.6,4815.4 1510.8,4815.4 ; 1492.2,4830.4 1500.6,4830.4 ; 1494,4831 1495.8,4831 ; 1501.2,4744 1517.4,4744 ; 1503,4743.4 1516.8,4743.4 ; 1504.2,4742.8 1516.2,4742.8 ; 1505.4,4742.2 1510.2,4742.2 ; 1506,4741.6 1509,4741.6 ; 1507.8,4741 1508.4,4741 ; 1512.6,4829.8 1514.4,4829.8 ; 1529.4,4758.4 1530.6,4758.4 ; 1529.4,4759 1530.6,4759 ; 1529.4,4759.6 1531.2,4759.6 ; 1530,4760.2 1531.8,4760.2 ; 1530,4760.8 1533,4760.8 ; 1530.6,4761.4 1537.2,4761.4 ; 1530.6,4762 1538.4,4762 ; 1530.6,4762.6 1539.6,4762.6 ; 1531.2,4763.2 1540.2,4763.2 ; 1531.2,4763.8 1541.4,4763.8 ; 1531.8,4764.4 1542,4764.4 ; 1531.8,4765 1543.2,4765 ; 1532.4,4765.6 1543.8,4765.6 ; 1532.4,4766.2 1545,4766.2 ; 1532.4,4766.8 1545.6,4766.8 ; 1533,4767.4 1546.2,4767.4 ; 1533,4768 1546.8,4768 ; 1533.6,4760.8 1536,4760.8 ; 1533.6,4768.6 1547.4,4768.6 ; 1533.6,4769.2 1548.6,4769.2 ; 1534.2,4760.2 1534.8,4760.2 ; 1534.2,4769.8 1549.2,4769.8 ; 1534.8,4770.4 1549.8,4770.4 ; 1534.8,4771 1550.4,4771 ; 1535.4,4771.6 1551,4771.6 ; 1536,4772.2 1551.6,4772.2 ; 1536,4772.8 1552.2,4772.8 ; 1536.6,4773.4 1552.8,4773.4 ; 1537.2,4774 1553.4,4774 ; 1537.8,4774.6 1554,4774.6 ; 1537.8,4775.2 1554.6,4775.2 ; 1537.8,4825 1561.2,4825 ; 1537.8,4825.6 1560.6,4825.6 ; 1537.8,4826.2 1560,4826.2 ; 1537.8,4826.8 1560,4826.8 ; 1537.8,4827.4 1559.4,4827.4 ; 1537.8,4828 1558.8,4828 ; 1537.8,4828.6 1558.2,4828.6 ; 1537.8,4829.2 1557.6,4829.2 ; 1537.8,4829.8 1557,4829.8 ; 1537.8,4830.4 1556.4,4830.4 ; 1538.4,4775.8 1555.8,4775.8 ; 1538.4,4823.2 1562.4,4823.2 ; 1538.4,4823.8 1561.8,4823.8 ; 1538.4,4824.4 1561.8,4824.4 ; 1538.4,4831 1555.8,4831 ; 1538.4,4831.6 1555.2,4831.6 ; 1538.4,4832.2 1554.6,4832.2 ; 1539,4776.4 1556.4,4776.4 ; 1539,4822 1563,4822 ; 1539,4822.6 1562.4,4822.6 ; 1539,4832.8 1554,4832.8 ; 1539,4833.4 1553.4,4833.4 ; 1539,4834 1553.4,4834 ; 1539.6,4777 1557,4777 ; 1539.6,4821.4 1563.6,4821.4 ; 1539.6,4834.6 1552.8,4834.6 ; 1539.6,4835.2 1552.2,4835.2 ; 1539.6,4835.8 1551.6,4835.8 ; 1540.2,4777.6 1557.6,4777.6 ; 1540.2,4820.8 1563.6,4820.8 ; 1540.2,4836.4 1551,4836.4 ; 1540.2,4837 1550.4,4837 ; 1540.2,4837.6 1549.8,4837.6 ; 1540.8,4778.2 1558.2,4778.2 ; 1540.8,4820.2 1564.2,4820.2 ; 1540.8,4838.2 1549.2,4838.2 ; 1540.8,4838.8 1548.6,4838.8 ; 1541.4,4778.8 1558.8,4778.8 ; 1541.4,4839.4 1548,4839.4 ; 1541.4,4840 1548,4840 ; 1542,4779.4 1559.4,4779.4 ; 1542,4780 1559.4,4780 ; 1542,4819.6 1564.8,4819.6 ; 1542,4840.6 1547.4,4840.6 ; 1542,4841.2 1547.4,4841.2 ; 1542.6,4780.6 1560,4780.6 ; 1542.6,4841.8 1546.8,4841.8 ; 1543.2,4781.2 1560.6,4781.2 ; 1543.2,4819 1565.4,4819 ; 1543.2,4842.4 1546.2,4842.4 ; 1543.8,4781.8 1561.2,4781.8 ; 1543.8,4818.4 1566,4818.4 ; 1543.8,4843 1545.6,4843 ; 1544.4,4782.4 1561.8,4782.4 ; 1544.4,4817.8 1566.6,4817.8 ; 1545,4783 1562.4,4783 ; 1545.6,4783.6 1563,4783.6 ; 1545.6,4817.2 1567.2,4817.2 ; 1546.2,4784.2 1563.6,4784.2 ; 1546.2,4816.6 1567.8,4816.6 ; 1546.8,4784.8 1564.2,4784.8 ; 1546.8,4816 1567.8,4816 ; 1547.4,4785.4 1564.8,4785.4 ; 1547.4,4815.4 1568.4,4815.4 ; 1548,4786 1565.4,4786 ; 1548,4814.8 1569,4814.8 ; 1548.6,4786.6 1566,4786.6 ; 1548.6,4814.2 1569.6,4814.2 ; 1549.2,4787.2 1566.6,4787.2 ; 1549.2,4813.6 1570.2,4813.6 ; 1549.8,4787.8 1567.2,4787.8 ; 1549.8,4813 1570.2,4813 ; 1550.4,4788.4 1567.8,4788.4 ; 1550.4,4789 1568.4,4789 ; 1550.4,4812.4 1570.8,4812.4 ; 1551,4789.6 1569,4789.6 ; 1551,4811.8 1571.4,4811.8 ; 1551.6,4811.2 1572,4811.2 ; 1552.2,4790.2 1589.4,4790.2 ; 1552.2,4810.6 1590,4810.6 ; 1552.8,4790.8 1589.4,4790.8 ; 1552.8,4810 1588.8,4810 ; 1553.4,4791.4 1588.8,4791.4 ; 1554,4792 1588.2,4792 ; 1554,4809.4 1588.2,4809.4 ; 1554.6,4792.6 1587.6,4792.6 ; 1554.6,4808.8 1587.6,4808.8 ; 1555.2,4808.2 1587,4808.2 ; 1555.8,4793.2 1587,4793.2 ; 1555.8,4793.8 1587,4793.8 ; 1555.8,4807.6 1585.8,4807.6 ; 1556.4,4794.4 1586.4,4794.4 ; 1556.4,4806.4 1584.6,4806.4 ; 1556.4,4807 1585.2,4807 ; 1557,4795 1586.4,4795 ; 1557,4805.8 1584,4805.8 ; 1557.6,4795.6 1585.8,4795.6 ; 1557.6,4805.2 1582.8,4805.2 ; 1558.2,4796.2 1585.2,4796.2 ; 1558.2,4804.6 1582.2,4804.6 ; 1558.8,4796.8 1584.6,4796.8 ; 1558.8,4804 1581.6,4804 ; 1559.4,4797.4 1583.4,4797.4 ; 1559.4,4803.4 1581,4803.4 ; 1560,4798 1582.8,4798 ; 1560.6,4798.6 1582.2,4798.6 ; 1560.6,4799.2 1581.6,4799.2 ; 1560.6,4802.8 1580.4,4802.8 ; 1561.2,4799.8 1581,4799.8 ; 1561.8,4800.4 1580.4,4800.4 ; 1561.8,4801 1580.4,4801 ; 1561.8,4802.2 1580.4,4802.2 ; 1562.4,4801.6 1579.8,4801.6 ; 1570.8,4789.6 1590,4789.6 ; 1571.4,4789 1590.6,4789 ; 1572,4788.4 1590.6,4788.4 ; 1572.6,4787.8 1591.2,4787.8 ; 1573.2,4787.2 1591.8,4787.2 ; 1573.8,4811.2 1590.6,4811.2 ; 1574.4,4811.8 1591.8,4811.8 ; 1575,4786.6 1592.4,4786.6 ; 1575.6,4786 1593,4786 ; 1575.6,4812.4 1592.4,4812.4 ; 1576.2,4784.2 1594.8,4784.2 ; 1576.2,4785.4 1593.6,4785.4 ; 1576.2,4813 1593.6,4813 ; 1576.8,4783.6 1594.8,4783.6 ; 1576.8,4784.8 1594.2,4784.8 ; 1577.4,4813.6 1594.8,4813.6 ; 1578,4783 1595.4,4783 ; 1578,4814.2 1596,4814.2 ; 1579.2,4782.4 1596,4782.4 ; 1579.2,4814.8 1597.2,4814.8 ; 1579.8,4781.8 1596.6,4781.8 ; 1579.8,4815.4 1598.4,4815.4 ; 1580.4,4781.2 1597.2,4781.2 ; 1581,4779.4 1599.6,4779.4 ; 1581,4816 1600.2,4816 ; 1581.6,4778.8 1599.6,4778.8 ; 1581.6,4780 1598.4,4780 ; 1581.6,4780.6 1597.8,4780.6 ; 1582.2,4778.2 1600.2,4778.2 ; 1582.2,4816.6 1602,4816.6 ; 1583.4,4777.6 1600.8,4777.6 ; 1583.4,4817.2 1604.4,4817.2 ; 1584.6,4817.8 1605,4817.8 ; 1585.2,4776.4 1602,4776.4 ; 1585.2,4777 1601.4,4777 ; 1585.8,4775.2 1602.6,4775.2 ; 1585.8,4775.8 1602,4775.8 ; 1585.8,4818.4 1605,4818.4 ; 1586.4,4774.6 1603.2,4774.6 ; 1587,4774 1603.8,4774 ; 1587.6,4773.4 1604.4,4773.4 ; 1587.6,4819 1605,4819 ; 1588.2,4772.8 1605,4772.8 ; 1588.8,4772.2 1605.6,4772.2 ; 1588.8,4819.6 1605,4819.6 ; 1590,4771.6 1606.2,4771.6 ; 1591.2,4771 1614,4771 ; 1591.2,4820.2 1605.6,4820.2 ; 1591.8,4770.4 1613.4,4770.4 ; 1592.4,4769.2 1613.4,4769.2 ; 1592.4,4769.8 1613.4,4769.8 ; 1593,4768.6 1612.8,4768.6 ; 1593.6,4767.4 1612.8,4767.4 ; 1593.6,4768 1612.8,4768 ; 1593.6,4820.8 1605,4820.8 ; 1594.8,4766.8 1612.2,4766.8 ; 1596.6,4766.2 1612.2,4766.2 ; 1596.6,4821.4 1603.2,4821.4 ; 1597.8,4765 1611.6,4765 ; 1597.8,4765.6 1612.2,4765.6 ; 1598.4,4764.4 1611.6,4764.4 ; 1600.2,4763.8 1611.6,4763.8 ; 1600.8,4763.2 1611,4763.2 ; 1602,4762 1611,4762 ; 1602,4762.6 1611,4762.6 ; 1603.2,4761.4 1610.4,4761.4 ; 1603.8,4760.8 1610.4,4760.8 ; 1604.4,4760.2 1610.4,4760.2 ; 1605.6,4759.6 1609.8,4759.6 ; 1607.4,4759 1609.2,4759 ; 1609.8,4771.6 1614,4771.6 ; 1611,4772.2 1614,4772.2 ; 1611,4772.8 1614.6,4772.8 ; 1611.6,4773.4 1614.6,4773.4 ; 1612.2,4774 1614.6,4774 ; 1612.2,4774.6 1614.6,4774.6 ; 1612.2,4775.2 1614.6,4775.2 ; 1612.8,4775.8 1614.6,4775.8 ; 1612.8,4776.4 1614,4776.4 ; 1613.4,4777 1614,4777 ; 1621.8,4750.6 1652.4,4750.6 ; 1621.8,4751.2 1653,4751.2 ; 1622.4,4750 1652.4,4750 ; 1622.4,4751.8 1653,4751.8 ; 1623,4748.2 1624.8,4748.2 ; 1623,4748.8 1627.2,4748.8 ; 1623,4749.4 1651.8,4749.4 ; 1623,4752.4 1653.6,4752.4 ; 1623,4753 1654.2,4753 ; 1623.6,4753.6 1654.2,4753.6 ; 1624.2,4829.2 1653.6,4829.2 ; 1624.2,4829.8 1653.6,4829.8 ; 1624.2,4830.4 1654.2,4830.4 ; 1624.8,4754.2 1654.2,4754.2 ; 1624.8,4826.8 1653,4826.8 ; 1624.8,4827.4 1652.4,4827.4 ; 1624.8,4828 1653,4828 ; 1624.8,4828.6 1653.6,4828.6 ; 1624.8,4831 1654.2,4831 ; 1625.4,4754.8 1654.8,4754.8 ; 1625.4,4831.6 1654.2,4831.6 ; 1626,4755.4 1654.8,4755.4 ; 1626,4822.6 1653,4822.6 ; 1626,4823.2 1653,4823.2 ; 1626,4823.8 1653,4823.8 ; 1626,4824.4 1653,4824.4 ; 1626,4825 1653,4825 ; 1626,4826.2 1653,4826.2 ; 1626.6,4822 1653,4822 ; 1626.6,4825.6 1653,4825.6 ; 1626.6,4832.2 1647,4832.2 ; 1627.2,4756 1654.8,4756 ; 1627.2,4821.4 1653,4821.4 ; 1627.8,4756.6 1654.8,4756.6 ; 1628.4,4757.2 1654.8,4757.2 ; 1628.4,4820.8 1653,4820.8 ; 1628.4,4832.8 1644,4832.8 ; 1629,4748.8 1651.2,4748.8 ; 1629,4757.8 1654.2,4757.8 ; 1629.6,4820.2 1653,4820.2 ; 1630.2,4748.2 1644,4748.2 ; 1630.2,4758.4 1654.2,4758.4 ; 1630.8,4759 1654.8,4759 ; 1630.8,4819.6 1653,4819.6 ; 1631.4,4759.6 1654.8,4759.6 ; 1632,4760.2 1654.8,4760.2 ; 1632,4760.8 1654.8,4760.8 ; 1632,4819 1653,4819 ; 1632.6,4761.4 1654.8,4761.4 ; 1632.6,4818.4 1653,4818.4 ; 1633.2,4762 1654.8,4762 ; 1633.2,4762.6 1654.8,4762.6 ; 1633.2,4817.8 1653,4817.8 ; 1633.8,4763.2 1654.8,4763.2 ; 1633.8,4763.8 1654.8,4763.8 ; 1633.8,4816.6 1653,4816.6 ; 1633.8,4817.2 1653,4817.2 ; 1634.4,4764.4 1654.8,4764.4 ; 1634.4,4765 1654.8,4765 ; 1634.4,4765.6 1654.2,4765.6 ; 1634.4,4766.2 1654.2,4766.2 ; 1634.4,4766.8 1654.2,4766.8 ; 1634.4,4815.4 1653,4815.4 ; 1634.4,4816 1653,4816 ; 1634.4,4833.4 1641.6,4833.4 ; 1635,4767.4 1654.2,4767.4 ; 1635,4768 1654.2,4768 ; 1635,4768.6 1654.2,4768.6 ; 1635,4814.2 1653,4814.2 ; 1635,4814.8 1653,4814.8 ; 1635.6,4769.2 1654.2,4769.2 ; 1635.6,4769.8 1654.8,4769.8 ; 1635.6,4812.4 1653,4812.4 ; 1635.6,4813 1653,4813 ; 1635.6,4813.6 1653,4813.6 ; 1636.2,4770.4 1654.8,4770.4 ; 1636.2,4771 1654.8,4771 ; 1636.2,4771.6 1654.8,4771.6 ; 1636.2,4810 1653,4810 ; 1636.2,4810.6 1653,4810.6 ; 1636.2,4811.2 1653,4811.2 ; 1636.2,4811.8 1653,4811.8 ; 1636.8,4772.2 1654.8,4772.2 ; 1636.8,4772.8 1654.8,4772.8 ; 1636.8,4807.6 1653,4807.6 ; 1636.8,4808.2 1653,4808.2 ; 1636.8,4808.8 1652.4,4808.8 ; 1636.8,4809.4 1652.4,4809.4 ; 1636.8,4834 1639.2,4834 ; 1637.4,4773.4 1654.8,4773.4 ; 1637.4,4774 1654.8,4774 ; 1637.4,4806.4 1653,4806.4 ; 1637.4,4807 1653,4807 ; 1638,4774.6 1654.8,4774.6 ; 1638,4775.2 1654.8,4775.2 ; 1638,4775.8 1654.8,4775.8 ; 1638,4800.4 1653,4800.4 ; 1638,4801 1653,4801 ; 1638,4801.6 1653,4801.6 ; 1638,4802.2 1653,4802.2 ; 1638,4802.8 1653,4802.8 ; 1638,4803.4 1652.4,4803.4 ; 1638,4804 1653,4804 ; 1638,4804.6 1653,4804.6 ; 1638,4805.2 1653,4805.2 ; 1638,4805.8 1653,4805.8 ; 1638.6,4747.6 1639.8,4747.6 ; 1638.6,4776.4 1654.8,4776.4 ; 1638.6,4777 1654.8,4777 ; 1638.6,4777.6 1654.8,4777.6 ; 1638.6,4778.2 1654.2,4778.2 ; 1638.6,4778.8 1654.2,4778.8 ; 1639.2,4779.4 1654.2,4779.4 ; 1639.2,4780 1654.2,4780 ; 1639.2,4780.6 1654.2,4780.6 ; 1639.2,4781.2 1654.2,4781.2 ; 1639.2,4781.8 1654.2,4781.8 ; 1639.2,4782.4 1654.2,4782.4 ; 1639.2,4783 1654.2,4783 ; 1639.2,4783.6 1654.2,4783.6 ; 1639.2,4784.2 1654.2,4784.2 ; 1639.2,4786 1654.2,4786 ; 1639.2,4786.6 1654.2,4786.6 ; 1639.2,4787.2 1654.2,4787.2 ; 1639.2,4787.8 1654.2,4787.8 ; 1639.2,4788.4 1654.2,4788.4 ; 1639.2,4789 1654.2,4789 ; 1639.2,4789.6 1654.2,4789.6 ; 1639.2,4790.2 1654.2,4790.2 ; 1639.2,4790.8 1654.2,4790.8 ; 1639.2,4791.4 1654.2,4791.4 ; 1639.2,4792 1654.2,4792 ; 1639.2,4792.6 1653.6,4792.6 ; 1639.2,4793.2 1653.6,4793.2 ; 1639.2,4793.8 1653.6,4793.8 ; 1639.2,4794.4 1653.6,4794.4 ; 1639.2,4795 1653.6,4795 ; 1639.2,4795.6 1653.6,4795.6 ; 1639.2,4796.2 1653.6,4796.2 ; 1639.2,4796.8 1653.6,4796.8 ; 1639.2,4797.4 1653.6,4797.4 ; 1639.2,4798 1653.6,4798 ; 1639.2,4798.6 1653.6,4798.6 ; 1639.2,4799.2 1653,4799.2 ; 1639.2,4799.8 1653,4799.8 ; 1639.8,4784.8 1654.2,4784.8 ; 1639.8,4785.4 1654.2,4785.4 ; 1640.4,4747.6 1641,4747.6 ; 1647,4748.2 1651.2,4748.2 ; 1647.6,4747.6 1650,4747.6 ; 1652.4,4832.2 1654.2,4832.2
  other v1: 1935,3805
  other v2: 1436.92,4770.39 1751.09,4770.39

## Polygon pours and split planes (outlines as drawn)
GND on Bottom Layer "Keep-Out Layer-No Net" (solid, remove dead copper, pour order 16): 2525,5025 1050,5025 1050,3500 2525,3500
GND on Top Layer "Keep-Out Layer-No Net" (solid, remove dead copper, pour order 18): 2525,5025 1050,5025 1050,3500 1055,3495 2525,3495

## Keep-outs
Keep-Out Layer:
  the board outline again, w5

## Silkscreen, mask and mechanical layers (free items; w line width, h text height)
Top Overlay:
  lines w10: 2225,3560 2325,3560 ; 2240,3540 2310,3540 ; 2255,3525 2295,3525 ; 2275,3560 2275,3595
  lines w15: 2225,3750 2225,3770 2325,3770 2325,3750
  lines w20: 2425,3845 2425,3855
  text "C6" at 1075,4935 h60 r270
  text "B11" at 2505,4860 h60 r90
  text "C7" at 1075,4835 h60 r270
  text "B10" at 2505,4755 h60 r90
  text "B5" at 1075,4735 h60 r270
  text "A15" at 2505,4640 h60 r90
  text "B8" at 1075,4635 h60 r270
  text "B1" at 2505,4565 h60 r90
  text "B9" at 1075,4535 h60 r270
  text "B0" at 2505,4470 h60 r90
  text "C0" at 1075,4435 h60 r270
  text "C5" at 2505,4370 h60 r90
  text "C1" at 1075,4335 h60 r270
  text "C4" at 2505,4265 h60 r90
  text "C2" at 1075,4240 h60 r270
  text "A7" at 2505,4165 h60 r90
  text "C3" at 1075,4135 h60 r270
  text "A6" at 2505,4065 h60 r90
  text "A0" at 1075,4040 h60 r270
  text "A5" at 2505,3965 h60 r90
  text "A1" at 1075,3940 h60 r270
  text "A2" at 1075,3840 h60 r270
  text "V-IN" at 2505,3795 h60 r90
  text "A3" at 1075,3740 h60 r270
  text "3.3V" at 2100,3740 h60
  text "Gnd" at 2505,3660 h60 r90
  text "3V" at 1080,3635 h60 r270
  text "3V" at 2505,3580 h60 r90
  text "G" at 1260,3530 h60
  text "C" at 1365,3530 h60
  text "D" at 1470,3530 h60
  text "V" at 1565,3530 h60
Bottom Overlay:
  drawing of 1961 lines, arcs and shapes, not listed
  text "SDA" at 2280,4945 h50 r90
  text "I2C_2" at 2185,4925 h60 r90
  text "SCL" at 2375,4845 h50 r90
  text "USART6" at 1285,4765 h60 r270
  text "CS" at 2380,4735 h60 r90
  text "~0" at 1205,4680 h60 r270
  text "LuaPad Ver1.0" at 2100,4630 h100
  text "A7" at 2380,4630 h60 r90
  text "~1" at 1205,4575 h60 r270
  text "Pzh@16.8.31" at 1805,4550 h60
  text "PWM" at 1285,4545 h60 r270
  text "A6" at 2380,4530 h60 r90
  text "ADC" at 2300,4505 h60 r90
  text "~2" at 1205,4480 h60 r270
  text "A5" at 2380,4430 h60 r90
  text "A0" at 1205,4370 h60 r270
  text "A4" at 2380,4335 h60 r90
  text "A1" at 1205,4275 h60 r270
  text "MOSI" at 2380,4250 h40 r90
  text "ADC" at 1285,4200 h60 r270
  text "A2" at 1205,4175 h60 r270
  text "SPI_1" at 2300,4160 h60 r90
  text "MISO" at 2380,4140 h40 r90
  text "A3" at 1205,4075 h60 r270
  text "SCK" at 2380,4035 h40 r90
  text "~3" at 1205,3975 h60 r270
  text "PWM" at 1285,3900 h60 r270
  text "~4" at 1205,3875 h60 r270
  text "USART2" at 1285,3670 h60 r270
Bottom Solder:
  drawing of 528 lines, arcs and shapes, not listed